# Altium PCB PCB1.PcbDoc
Units mm, origin at the board's own origin, x right, y up, seen from the top; angles counter-clockwise.
Board outline 152.4 x 101.6 mm, 2 copper layers (Top Layer, Bottom Layer); 28 components, 31 nets, 126 pads, 25 vias.
Unrouted connection lines stored in the file: 1.
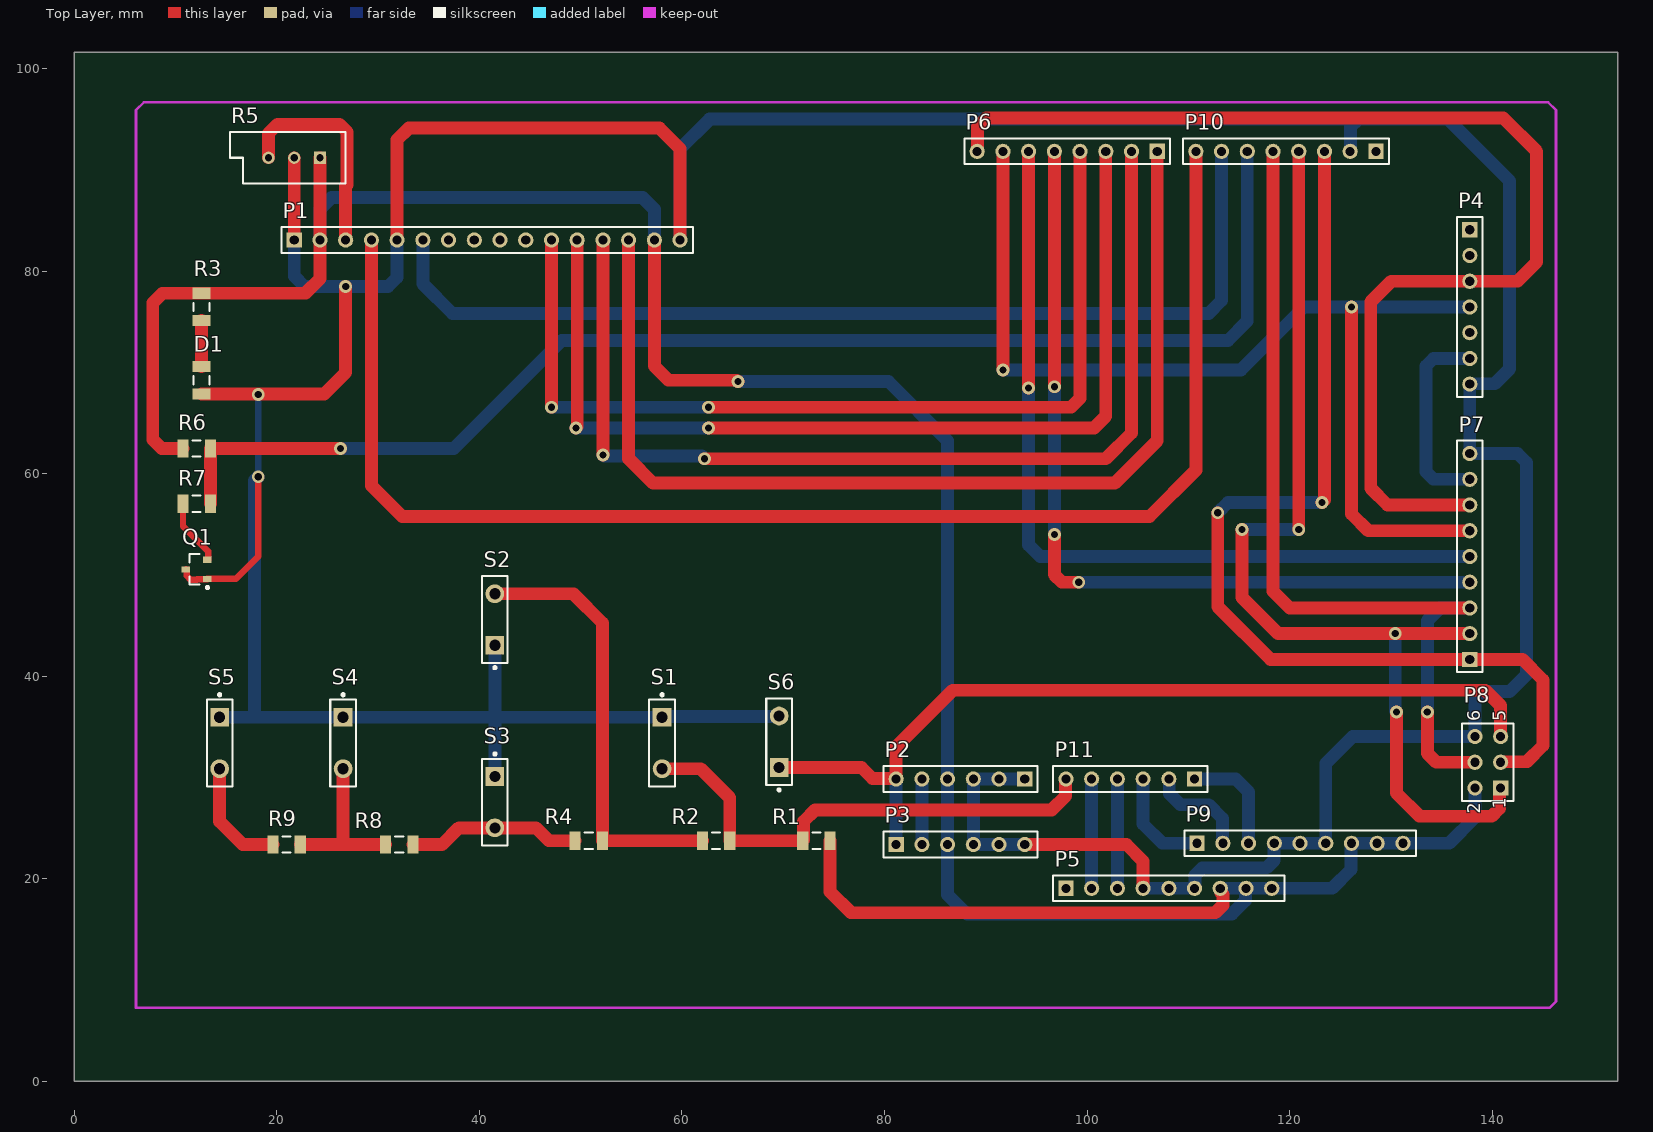
[diagram p0: Top Layer view]
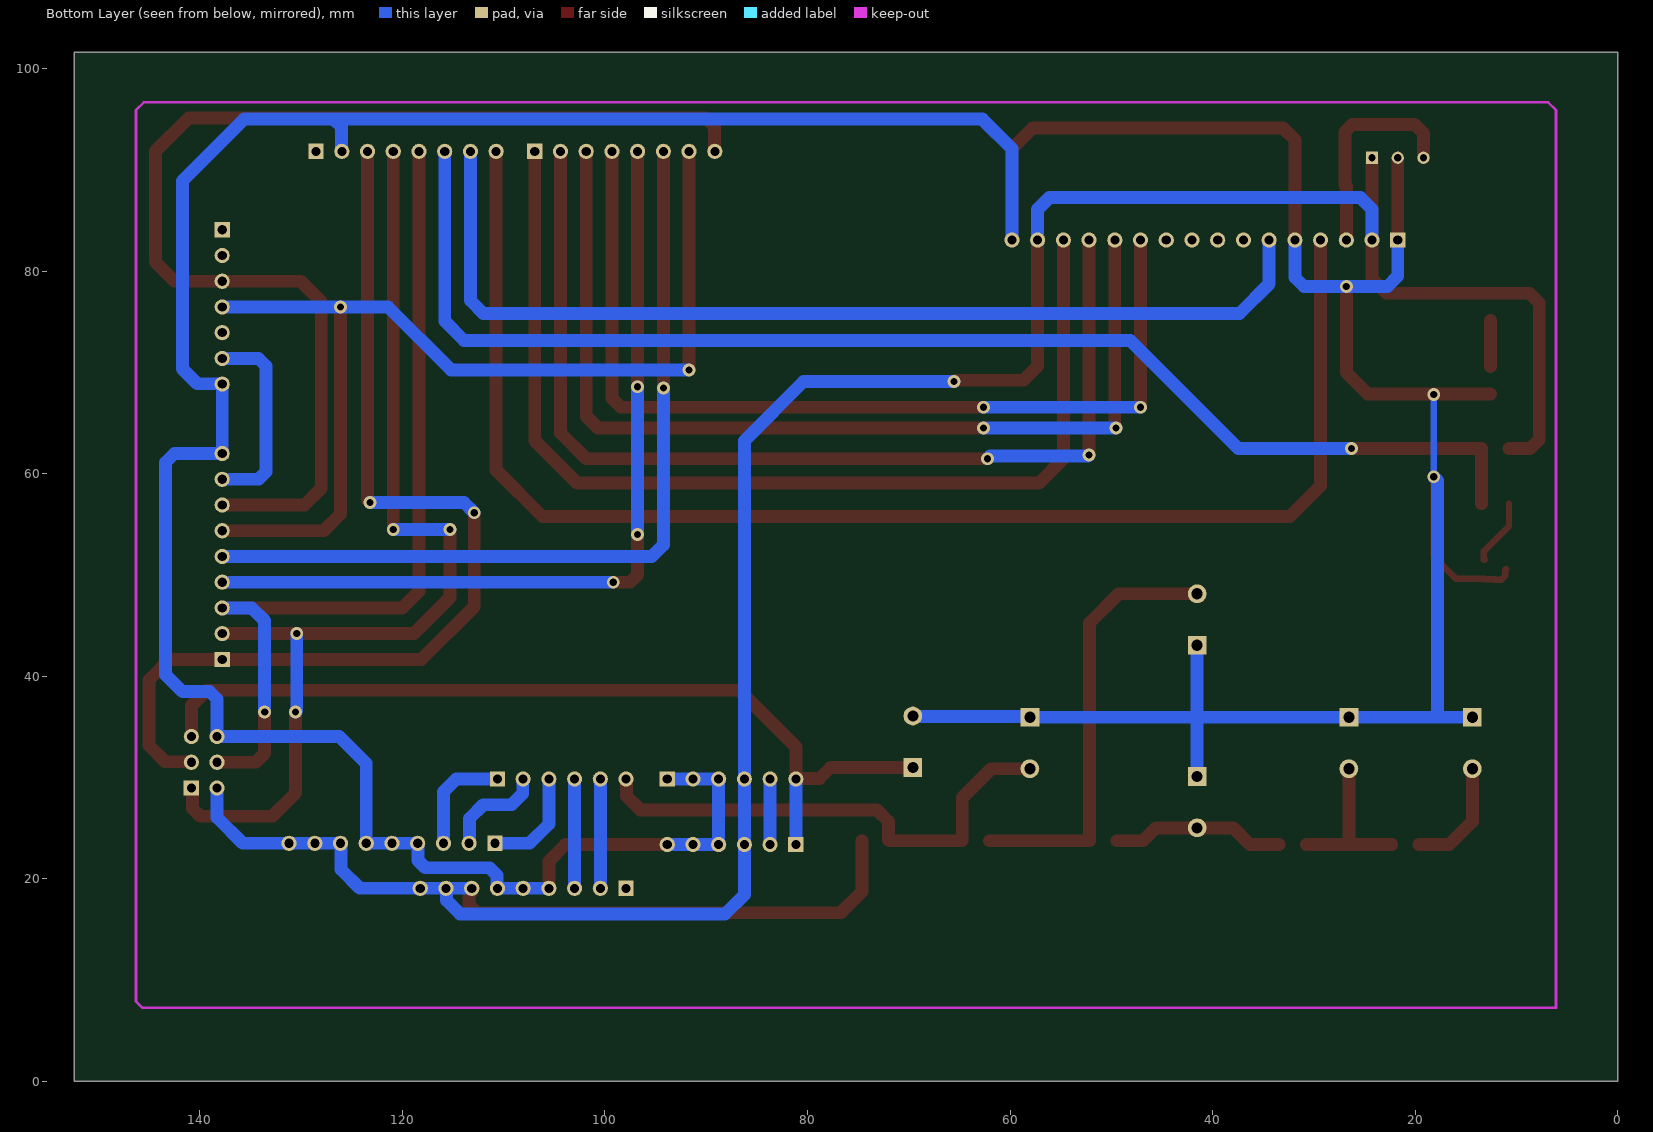
[diagram p1: Bottom Layer view, seen from below]

## Layer stack, top to bottom
Top Solder: solder mask 0.0102, Solder Resist, Dk 3.5
Top Layer: signal copper 0.0356
Dielectric 1: dielectric 0.32, FR-4, Dk 4.8
Bottom Layer: signal copper 0.0356
Bottom Solder: solder mask 0.0102, Solder Resist, Dk 3.5

## Board outline
0,0 152.4,0 152.4,101.6 0,101.6

## Design rules (kind name [scope] priority, off if disabled: settings)
Clearance [All] p1: gap=0.254 ignorepadtopadclearanceinfootprint=FALSE except(0: Arc-Hole Track-Hole SMDPad-Hole THPad-Hole Via-Hole Fill-Hole Poly-Hole Region-Hole Text-Hole)
PolygonConnect [All] p1: connectstyle=Relief reliefconductorwidth=0.254 reliefentries=4 polygonreliefangle="90 Angle" airgapwidth=0.254
RoutingVias [All] p1: holewidth=0.711 width=1.27 viastyle="Through Hole" minholewidth=0.711 minwidth=1.27 maxholewidth=0.711 maxwidth=1.27
SolderMaskExpansion [All] p1: expansion=0.102 istentingtop=FALSE
Width [All] p1: maxlimit=2.54 minlimit=0.254 preferedwidth=1.27
30 further rules are at their usual default settings.

## Components (designator, comment, footprint, x,y, rotation, side; value= is the part's Value field where it differs from the comment)
D1 "LED0" INDC3216 12.573,69.215 r270 top
P1 "LCD 16*2" HDR1X16 21.717,83.058 r0 top
P2 "Header 6" HDR1X6 93.853,29.845 r180 top
P3 "Header 6" HDR1X6 81.153,23.368 r0 top
P4 "Header 7" HDR1X7 137.795,84.074 r270 top
P5 "Header 9" HDR1X9 97.917,19.05 r0 top
P6 "Header 8" HDR1X8 106.934,91.821 r180 top
P7 "Header 9" HDR1X9 137.795,41.656 r90 top
P8 "Header 3X2" HDR2X3 140.843,28.956 r90 top
P9 "Header 9" HDR1X9 110.871,23.495 r0 top
P10 "Header 8" HDR1X8 128.524,91.821 r180 top
P11 "Header 6" HDR1X6 110.617,29.845 r180 top
Q1 "S9013" SOT-23_L 12.065,50.546 r180 top
R1 "" INDC3216 73.279,23.749 r0 top value=2K
R2 "" INDC3216 63.373,23.749 r0 top value=330R
R3 "" INDC3216 12.573,76.454 r90 top value=1K
R4 "" INDC3216 50.8,23.749 r0 top value=620R
R5 "RPot" VR5 21.717,91.186 r180 top value=10K
R6 "" INDC3216 12.082,62.478 r0 top value=4K7
R7 "" INDC3216 12.082,57.017 r180 top value=10K
R8 "" INDC3216 32.084,23.368 r0 top value=1K
R9 "" INDC3216 20.955,23.368 r0 top value=3K3
S1 "RIGHT" SPST-2 58.039,33.401 r270 top
S2 "UP" SPST-2 41.529,45.593 r90 top
S3 "DOWN" SPST-2 41.529,27.559 r270 top
S4 "LEFT" SPST-2 26.543,33.401 r270 top
S5 "SELECT" SPST-2 14.351,33.401 r270 top
S6 "RST" SPST-2 69.596,33.528 r90 top

## Footprints (in the part's own frame and the unit in brackets; to place one, negate y for a bottom-side part, rotate by r counter-clockwise, add the part's x,y. Pads: shape width x height; smd on the part's side, far side on the other; paste and mask are expansions set on the pad)
HDR1X6 [mm] "Connector; Header; 6 Position"
  rect 1.5x1.5 hole 0.9: 1(0,0)
  round 1.5 hole 0.9: 2(2.54,0) 3(5.08,0) 4(7.62,0) 5(10.16,0) 6(12.7,0)
  silkscreen extent -1.27,-1.27 13.97,1.27
HDR1X7 [mm] "Connector; Header; 7 Position"
  rect 1.5x1.5 hole 0.9: 1(0,0)
  round 1.5 hole 0.9: 2(2.54,0) 3(5.08,0) 4(7.62,0) 5(10.16,0) 6(12.7,0) 7(15.24,0)
  silkscreen extent -1.27,-1.27 16.51,1.27
HDR1X8 [mm] "Connector; Header; 8 Position"
  rect 1.5x1.5 hole 0.9: 1(0,0)
  round 1.5 hole 0.9: 2(2.54,0) 3(5.08,0) 4(7.62,0) 5(10.16,0) 6(12.7,0) 7(15.24,0) 8(17.78,0)
  silkscreen extent -1.27,-1.27 19.05,1.27
HDR1X9 [mm] "Connector; Header; 9 Position"
  rect 1.5x1.5 hole 0.9: 1(0,0)
  round 1.5 hole 0.9: 2(2.54,0) 3(5.08,0) 4(7.62,0) 5(10.16,0) 6(12.7,0) 7(15.24,0) 8(17.78,0) 9(20.32,0)
  silkscreen extent -1.27,-1.27 21.59,1.27
HDR1X16 [mm] "Connector; Header; 16 Position"
  rect 1.5x1.5 hole 0.9: 1(0,0)
  round 1.5 hole 0.9: 2(2.54,0) 3(5.08,0) 4(7.62,0) 5(10.16,0) 6(12.7,0) 7(15.24,0) 8(17.78,0) 9(20.32,0) 10(22.86,0) 11(25.4,0) 12(27.94,0) 13(30.48,0) 14(33.02,0) 15(35.56,0) 16(38.1,0)
  silkscreen extent -1.27,-1.27 39.37,1.27
HDR2X3 [mm] "Connector; Header; 3x2 Position"
  rect 1.5x1.5 hole 0.9: 1(0,0)
  round 1.5 hole 0.9: 2(0,2.54) 3(2.54,0) 4(2.54,2.54) 5(5.08,0) 6(5.08,2.54)
  silkscreen extent -1.27,-1.27 6.35,3.81
INDC3216 [mm] "Chip Inductor, Body 3.2x1.6mm, IPC High Density"
  rect 1.1x1.8 smd: 1(-1.35,0) 2(1.35,0)
  silkscreen extent -0.4,-0.8 0.4,0.8, body extent -1.7,-0.9 1.7,0.9, height 0.55
SOT-23_L [mm] "SOT23, 3-Leads, Body 2.9x1.3mm, Pitch 0.95mm, Lead Span 2.5mm, IPC High Density"
  rect 0.85x0.6 smd: 1(-1.075,0.95) 2(-1.075,-0.95) 3(1.075,0)
  silkscreen extent -1.2,-1.5 0.7,1.92, body extent -0.7,-1.5 0.7,1.5, height 1.1
SPST-2 [mm] "Switch; 2 Leads"
  rect 1.85x1.85 hole 1.1: 1(-2.54,0)
  round 1.85 hole 1.1: 2(2.54,0)
  silkscreen extent -4.89,-1.27 4.28,1.27
VR5 [mm] "Thru-Hole; 3 Leads"
  rect 1.2x1.2 hole 0.7: 1(-2.54,0)
  round 1.2 hole 0.7: 2(0,0) 3(2.54,0)
  silkscreen extent -5.08,-2.54 6.35,2.54

## Part data
D1: "Typical INFRARED GaAs LED", LatestRevisionDate=08-Jul-2005, LatestRevisionNote="Mech Layer 1 removed.", PackageDescription="LED; 2 Leads", PackageReference=LED-0, Published=8-Jun-2000, Publisher="Altium Limited"
P1: library part "Header 16", "Header, 16-Pin", LatestRevisionDate=17-Jul-2002, LatestRevisionNote="Re-released for DXP Platform.", Publisher="Altium Limited"
P2 P3 P11: "Header, 6-Pin", LatestRevisionDate=17-Jul-2002, LatestRevisionNote="Re-released for DXP Platform.", Publisher="Altium Limited"
P4: "Header, 7-Pin", LatestRevisionDate=17-Jul-2002, LatestRevisionNote="Re-released for DXP Platform.", Publisher="Altium Limited"
P5 P7 P9: "Header, 9-Pin", LatestRevisionDate=17-Jul-2002, LatestRevisionNote="Re-released for DXP Platform.", Publisher="Altium Limited"
P6 P10: "Header, 8-Pin", LatestRevisionDate=17-Jul-2002, LatestRevisionNote="Re-released for DXP Platform.", Publisher="Altium Limited"
P8: "Header, 3-Pin, Dual row", LatestRevisionDate=17-Jul-2002, LatestRevisionNote="Re-released for DXP Platform.", Publisher="Altium Limited"
Q1: library part NPN, "NPN Bipolar Transistor", Code_JEDEC=TO-226-AA, LatestRevisionDate=17-Jul-2002, LatestRevisionNote="Re-released for DXP Platform.", PackageDescription="TO, Flat Index; 3 In-Line, Axial Leads; Body Dia. 4.8mm; Leads 0.55 x 0.51 mm (max)", PackageReference=TO-226-AA, Published=8-Jun-2000, Publisher="Altium Limited"
R1 R2 R3 R4 R6 R7 R8 R9: library part Res1, "Resistor", LatestRevisionDate=17-Jul-2002, LatestRevisionNote="Re-released for DXP Platform.", PackageDescription="Axial Device, Thru-Hole; 2 Leads; 0.3 in Pin Spacing", PackageReference=AXIAL-0.3, Published=8-Jun-2000, Publisher="Altium Limited"
R5: "Potentiometer", LatestRevisionDate=17-Jul-2002, LatestRevisionNote="Re-released for DXP Platform.", PackageDescription="Variable Resistor, Thru-Hole; 3 Leads", PackageReference=VR5, Published=8-Jun-2000, Publisher="Altium Limited", Set Position=0.5, Sim Note="Enter the Resistance value and the set point into parameter fields."
S1 S2 S3 S4 S5 S6: library part SW-PB, "Switch", LatestRevisionDate=17-Jul-2002, LatestRevisionNote="Re-released for DXP Platform.", PackageDescription="Switch; 2 Leads", PackageReference=SPST-2, Published=24-Mar-1999, Publisher="Altium Limited"

## Via types
v1: diameter 1.27, hole 0.711, Top Layer to Bottom Layer, 25 vias

## Nets (pads, with @x,y where several pads share a name; then routed paths per layer and width w, separated by ;. In a path a pad name is that pad's centre, name@x,y a point inside that pad or via, vN(x,y) a via of type N, cw(c..) or ccw(c..) an arc to the next point about the centre after c; other vN are vias at no path point)
GND: D1.2 P1.1 P1.5 P1.16 P2.1 P2.2 P2.3 P3.4 P3.5 P3.6 P4.7 P5.4 P5.5 P5.6 P7.9 P8.6 P9.4 P9.5 P9.6 P10.2 Q1.1 Q1.3 R5.2 S1.1 S2.1 S3.1 S4.1 S5.1 S6.2 | length 457
  Top Layer w0.635: Q1.3 11.08,50.546 11.097,50.528 11.097,49.902 11.469,49.53 12.104,49.53 12.153,49.578 13.122,49.578 Q1.1 15.941,49.596 18.161,51.816 v1(18.161,59.69)
  Top Layer w1.27: D1.2 24.685,67.865 26.797,69.977 v1(26.797,78.486) ; P1.1 R5.2 ; P1.5 31.877,92.964 33.02,94.107 57.785,94.107 59.817,92.075 P1.16 ; P3.6 103.886,23.368 105.537,21.717 P5.4
  Bottom Layer w0.635: v1(18.161,59.69) v1(18.161,67.818)
  Bottom Layer w1.27: S5.1 17.78,35.941 ; v1(18.161,59.69) 17.78,59.309 17.78,35.941 ; P1.1 21.717,79.502 22.733,78.486 v1(26.797,78.486) 30.988,78.486 31.877,79.375 P1.5 ; S3.1 41.529,35.941 ; S2.1 41.529,35.941 ; P1.16 59.817,92.075 62.738,94.996 126.772,94.996 ; S6.2 69.532,36.005 58.102,36.005 S1.1 41.529,35.941 ; P3.6 P3.5 P3.4 P2.3 P2.2 P2.1 ; P5.4 P5.5 P5.6 110.661,19.094 110.661,20.338 111.405,21.082 117.747,21.082 118.447,21.782 118.447,23.451 P9.4 P9.5 P9.6 123.571,31.369 126.238,34.036 P8.6 138.303,37.737 139.047,38.481 141.732,38.481 143.383,40.132 143.383,61.087 142.494,61.976 P7.9 P4.7 137.839,68.878 140.252,68.878 141.732,70.358 141.732,88.9 135.636,94.996 126.772,94.996 ; P10.2 126.028,91.865 126.028,94.252 126.772,94.996 ; 17.78,35.941 S4.1 41.529,35.941
NetD1_1: D1.1 R3.1 | length 4.5
  Top Layer w1.27: D1.1 R3.1
NetP1_2: P1.2 P1.15 P2.4 P3.3 P4.6 P5.7 P5.8 P5.9 P7.8 P8.2 P9.7 P9.8 P9.9 R1.2 R3.2 R5.1 R6.1 | length 306.4
  Top Layer w1.27: R6.1 8.642,62.478 8.129,62.991 7.747,63.373 7.747,76.835 8.716,77.804 R3.2 ; R3.2@12.7,77.804 22.813,77.804 24.257,79.248 P1.2 R5.1 ; P1.15 57.277,70.612 58.674,69.215 65.405,69.215 v1(65.532,69.088) ; R1.2 74.629,18.716 76.708,16.637 112.667,16.637 113.411,17.381 113.411,18.433 113.201,18.643 113.201,19.006 P5.7
  Bottom Layer w1.27: P1.2 24.257,86.106 25.4,87.249 56.134,87.249 57.277,86.106 P1.15 ; v1(65.532,69.088) 80.391,69.088 86.233,63.246 P2.4 P3.3 86.233,18.415 88.138,16.51 114.3,16.51 115.653,17.863 115.653,19.006 P5.8 ; P5.7 P5.8 ; P7.8 134.221,59.436 133.477,60.18 133.477,70.63 134.221,71.374 P4.6 ; P8.2 138.303,26.035 135.763,23.495 P9.9 P9.8 P9.7 126.067,23.451 126.067,20.911 124.206,19.05 P5.9 P5.8
NetP1_3: P1.3 R5.3 | length 21.6
  Top Layer w1.27: R5.3 19.177,93.599 20.066,94.488 26.18,94.488 26.924,93.744 26.924,88.496 26.797,88.369 P1.3
NetP1_4: P1.4 P10.8 | length 140.3
  Top Layer w1.27: P1.4 29.337,58.801 32.385,55.753 106.172,55.753 110.744,60.325 P10.8
NetP1_6: P1.6 P10.7 | length 99.7
  Bottom Layer w1.27: P1.6 34.417,78.74 37.338,75.819 112.014,75.819 113.284,77.089 P10.7
NetP1_11: P1.11 P6.4 | length 93.5
  Top Layer w1.27: v1(47.117,66.548) P1.11 ; v1(62.611,66.548) 98.425,66.548 99.314,67.437 P6.4
  Bottom Layer w1.27: v1(47.117,66.548) v1(62.611,66.548)
NetP1_12: P1.12 P6.3 | length 97.6
  Top Layer w1.27: v1(49.53,64.516) 49.657,64.643 P1.12 ; v1(62.611,64.516) 100.711,64.516 101.854,65.659 P6.3
  Bottom Layer w1.27: v1(49.53,64.516) v1(62.611,64.516)
NetP1_13: P1.13 P6.2 | length 102.4
  Top Layer w1.27: v1(52.197,61.849) v1(52.197,83.058) ; v1(62.23,61.468) 101.854,61.468 104.394,64.008 P6.2
  Bottom Layer w1.27: v1(52.197,61.849) 52.324,61.722 61.976,61.722 v1(62.23,61.468)
NetP1_14: P1.14 P6.1 | length 105.1
  Top Layer w1.27: P1.14 54.737,61.468 57.15,59.055 102.743,59.055 106.934,63.246 P6.1
NetP2_5: P2.5 P3.2 | length 6.5
  Bottom Layer w1.27: P3.2 P2.5
NetP2_6: P2.6 P3.1 P8.5 S6.1 | length 87.4
  Top Layer w1.27: S6.1 77.724,30.988 78.823,29.889 81.109,29.889 P2.6 81.153,33.02 86.741,38.608 139.319,38.608 140.843,37.084 P8.5
  Bottom Layer w1.27: P3.1 P2.6
NetP4_3: P4.3 P6.8 P7.7 | length 117.2
  Top Layer w1.27: P6.8 89.198,91.865 89.198,94.278 90.043,95.123 141.097,95.123 144.399,91.821 144.399,80.899 142.494,78.994 P4.3 130.048,78.994 128.016,76.962 128.016,58.547 129.667,56.896 P7.7
NetP4_4: P4.4 P6.7 P7.6 | length 103.1
  Top Layer w1.27: v1(91.694,70.231) P6.7 ; v1(126.111,76.454) 126.111,56.007 127.762,54.356 P7.6
  Bottom Layer w1.27: v1(91.694,70.231) 115.189,70.231 121.412,76.454 v1(126.111,76.454) P4.4
NetP5_2: P5.2 P11.5 | length 10.8
  Bottom Layer w1.27: P5.2 P11.5
NetP5_3: P5.3 P11.4 | length 10.8
  Bottom Layer w1.27: P5.3 P11.4
NetP6_5: P6.5 P7.4 | length 83.1
  Top Layer w1.27: v1(96.774,53.975) 96.774,50.02 97.518,49.276 v1(99.187,49.276) ; v1(96.774,68.58) P6.5
  Bottom Layer w1.27: v1(96.774,53.975) v1(96.774,68.58) ; v1(99.187,49.276) P7.4
NetP6_6: P6.6 P7.5 | length 82.9
  Top Layer w1.27: v1(94.234,68.453) P6.6
  Bottom Layer w1.27: v1(94.234,68.453) 94.234,52.959 95.377,51.816 P7.5
NetP7_1: P7.1 P8.3 P10.3 | length 101.2
  Top Layer w1.27: v1(112.903,56.134) 112.903,46.863 118.11,41.656 P7.1 143.002,41.656 145.034,39.624 145.034,33.147 143.427,31.54 140.887,31.54 P8.3 ; v1(123.19,57.15) 123.444,57.404 P10.3
  Bottom Layer w1.27: v1(112.903,56.134) 113.919,57.15 v1(123.19,57.15)
NetP7_2: P7.2 P8.1 P10.4 | length 102.9
  Top Layer w1.27: v1(115.316,54.483) 115.316,47.752 118.872,44.196 v1(130.429,44.196) P7.2 ; v1(120.904,54.483) P10.4 ; v1(130.556,36.449) 130.556,28.448 132.842,26.162 139.954,26.162 140.728,26.936 140.728,28.841 P8.1
  Bottom Layer w1.27: v1(115.316,54.483) v1(120.904,54.483) ; v1(130.429,44.196) 130.429,36.576 v1(130.556,36.449)
NetP7_3: P7.3 P8.4 P10.5 | length 86.4
  Top Layer w1.27: P10.5 118.364,48.387 120.015,46.736 P7.3 ; v1(133.604,36.449) 133.604,32.385 134.493,31.496 P8.4
  Bottom Layer w1.27: v1(133.604,36.449) 133.604,45.466 134.874,46.736 P7.3
NetP9_1: P9.1 P11.3 | length 10.6
  Bottom Layer w1.27: P11.3 105.537,25.4 107.442,23.495 P9.1
NetP9_2: P9.2 P11.2 | length 10.2
  Bottom Layer w1.27: P11.2 108.121,29.801 108.121,28.404 109.22,27.305 112.014,27.305 113.367,25.952 113.367,23.539 P9.2
NetP9_3: P9.3 P11.1 | length 10.9
  Bottom Layer w1.27: P11.1 114.681,29.845 115.951,28.575 P9.3
NetP10_6: P10.6 R6.2 R7.1 | length 129.8
  Top Layer w1.27: R7.1 R6.2 26.283,62.478 v1(26.289,62.484)
  Bottom Layer w1.27: v1(26.289,62.484) 37.465,62.484 48.133,73.152 113.919,73.152 115.824,75.057 P10.6
NetP11_6: P11.6 R1.1 R2.2 S1.2 | length 49.9
  Top Layer w1.27: S1.2 61.849,30.861 64.723,27.987 R2.2 R1.1 72.014,23.834 72.014,25.659 73.152,26.797 96.52,26.797 97.873,28.15 97.873,29.801 P11.6
NetQ1_2: Q1.2 R7.2 | length 6.6
  Top Layer w0.635: R7.2 10.732,54.8 13.208,52.324 13.208,51.513 13.19,51.496 Q1.2
NetR2_1: R2.1 R4.2 S2.2 | length 43.2
  Top Layer w1.27: S2.2 49.276,48.133 52.15,45.259 R4.2 R2.1
NetR4_1: R4.1 R8.2 S3.2 | length 17.2
  Top Layer w1.27: R8.2 36.322,23.368 37.973,25.019 S3.2 45.593,25.019 45.973,24.639 46.863,23.749 R4.1
NetR8_1: R8.1 R9.2 S4.2 | length 15.9
  Top Layer w1.27: R9.2 26.543,23.368 ; S4.2 26.543,23.368 ; R8.1 26.543,23.368
NetR9_1: R9.1 S5.2 | length 11.4
  Top Layer w1.27: S5.2 14.351,25.654 16.637,23.368 R9.1
pads on no net: P1.7 P1.8 P1.9 P1.10 P4.1 P4.2 P4.5 P5.1 P10.1

## Keep-outs
Keep-Out Layer:
  lines w0.254: 6.096,86.487 6.096,94.238 6.096,95.885 6.858,96.647 8.89,96.647 143.282,96.647 145.542,96.647 146.304,95.885 146.304,93.599 146.304,19.177 146.304,7.874 145.669,7.239 6.096,7.239 6.096,7.493 6.096,19.177 6.096,86.741

## Other copper
Multi-Layer:
  text "FURKAN YARDIMCI" at 13.829,10.009 h8

## Text inside footprints (layer, text, board x,y; h text height)
P8: Top Overlay "1" at 141.351,26.924 h1.27 r90; Top Overlay "2" at 138.811,26.416 h1.27 r90; Top Overlay "5" at 141.351,35.56 h1.27 r90; Top Overlay "6" at 138.811,35.56 h1.27 r90